# EAGLE board DMB-4770-4-Analog_4-DAC-C (EAGLE 6.5.0)
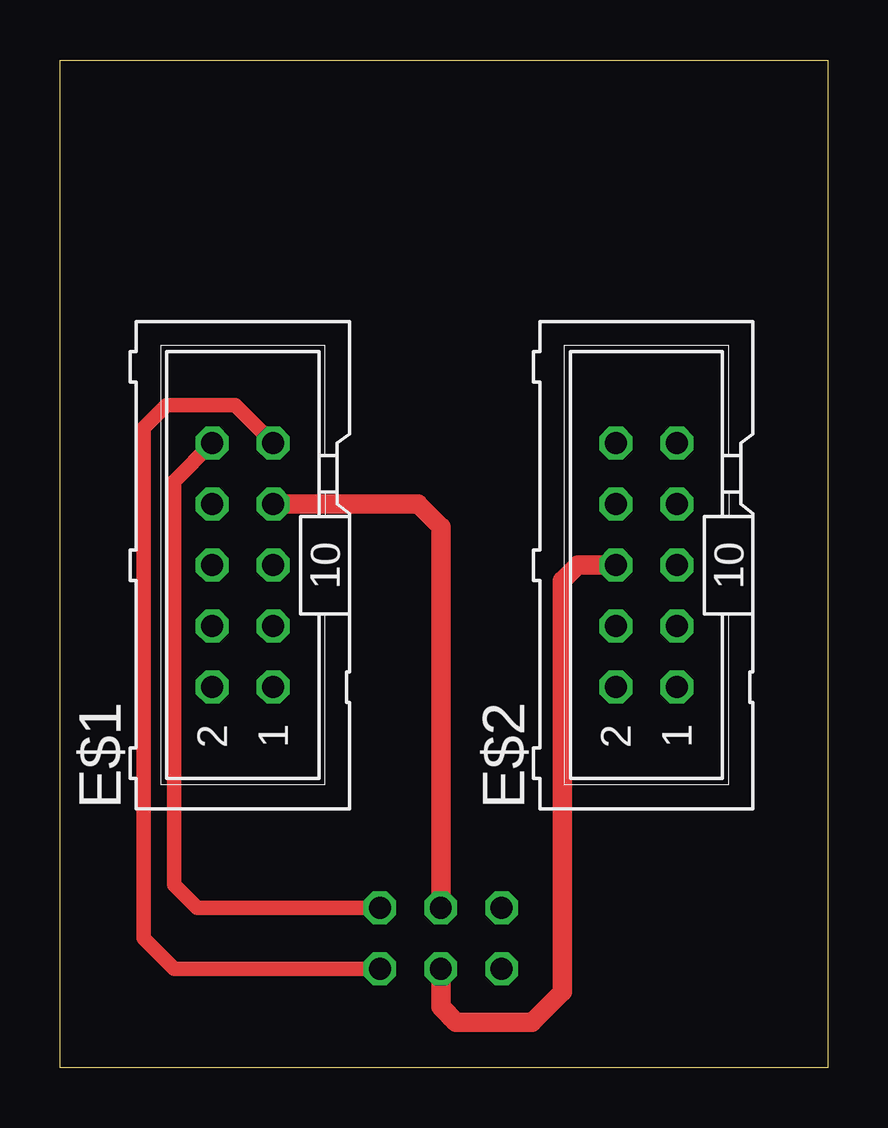
[diagram p0: board, top side]
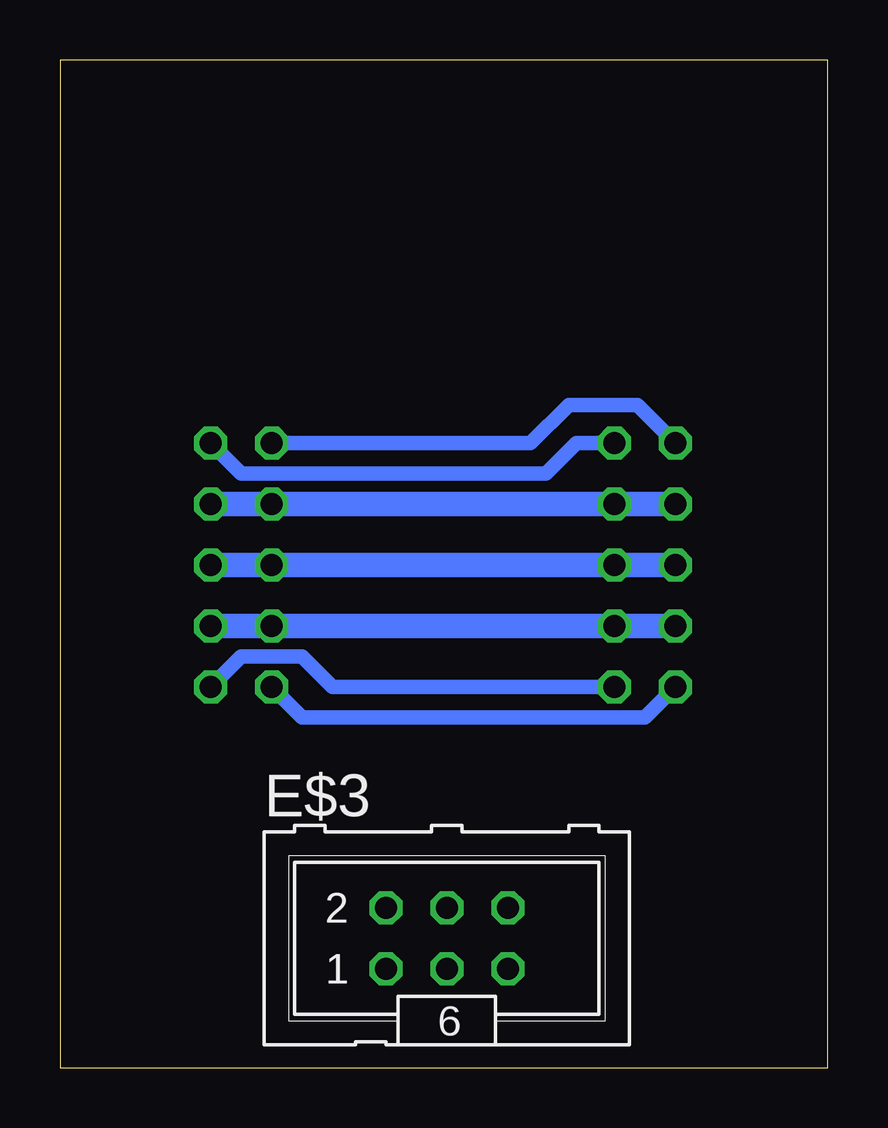
[diagram p1: board, bottom side, seen from below]

Size 32 x 42.01 mm. Coordinates in mm from the lower left corner, seen from the top.
Outline: 0,0 0,42.01 32,42.01 32,0 0,0
Copper layers (1*16): Top 0.0356mm / dielectric 1.5011mm / Bottom 0.0356mm
Design rules "LaenPCBOrder": minimum track width 6mil, minimum drill 13mil, track to track 6mil, track to pad 6mil, pad to pad 6mil, via to via 6mil, smd to smd 6mil, copper to edge 15mil, drill to drill 6mil, minimum pad ring 7mil, minimum via ring 7mil, stop-mask expansion 3mil, vias tented up to drill 0mil, thermal gap 10mil

## Footprints (pad centres in the part's own frame; a part is rotated, then mirrored left to right if it is on the bottom)
ML10 = drill 0.914 octagon: 1 -5.08,-1.27; 2 -5.08,1.27; 3 -2.54,-1.27; 4 -2.54,1.27; 5 0,-1.27; 6 0,1.27; 7 2.54,-1.27; 8 2.54,1.27; 9 5.08,-1.27; 10 5.08,1.27
ML6 = drill 0.914 octagon: 1 -2.54,-1.27; 2 -2.54,1.27; 3 0,-1.27; 4 0,1.27; 5 2.54,-1.27; 6 2.54,1.27

## Placement (x,y rotation side)
E$1  [ML10]  7.62,20.95 90 top
E$2  [ML10]  24.45,20.95 90 top
E$3  [ML6]  15.88,5.4 0 bottom

## Library data of the parts
E$1-E$3 = con-harting-ml

## Nets
3V3: E$1.7 E$1.8 E$2.7 E$2.8 E$3.4
5V: E$1.3 E$1.4 E$2.3 E$2.4
GND: E$1.5 E$1.6 E$2.5 E$2.6 E$3.3
S$4: E$1.1 E$2.1
S$5: E$1.2 E$2.2
SCL: E$1.10 E$2.10 E$3.6
SDA: E$1.9 E$2.9 E$3.5

## Tracks (layer width: path | path; a pad name or v marks a point on that pad's centre or on a via)
3V3
  Top 0.813: E$1.7 14.92,23.5 15.88,22.54 E$3.4
  Bottom 1.016: E$1.8 E$1.7 E$2.8 E$2.7
5V
  Bottom 1.016: E$1.4 E$1.3 E$2.4 E$2.3
GND
  Top 0.813: E$3.3 15.88,2.54 16.51,1.91 19.68,1.91 20.95,3.17 20.95,20.32 21.59,20.95 E$2.6
  Bottom 1.016: E$2.5 E$2.6 E$1.5 E$1.6
S$4
  Bottom 0.61: E$1.1 20.64,15.88 21.91,17.14 24.45,17.14 E$2.1
S$5
  Bottom 0.61: E$1.2 7.62,14.61 21.91,14.61 E$2.2
SCL
  Top 0.61: E$3.6 5.71,6.67 4.76,7.62 4.76,24.45 E$1.10
  Bottom 0.61: E$2.10 12.38,26.04 10.79,27.62 7.94,27.62 E$1.10
SDA
  Top 0.61: E$3.5 4.76,4.13 3.49,5.4 3.49,26.67 4.45,27.62 7.3,27.62 E$1.9
  Bottom 0.61: E$2.9 24.45,24.77 11.75,24.77 10.48,26.04 E$1.9